# Altium PCB PCB3.PcbDoc
Units mil, origin at the board's own origin, x right, y up, seen from the top; angles counter-clockwise.
Board outline 6000 x 4000 mil, 2 copper layers (Top Layer, Bottom Layer); 25 components, 67 nets, 164 pads, 0 vias.
Unrouted connection lines stored in the file: 38.
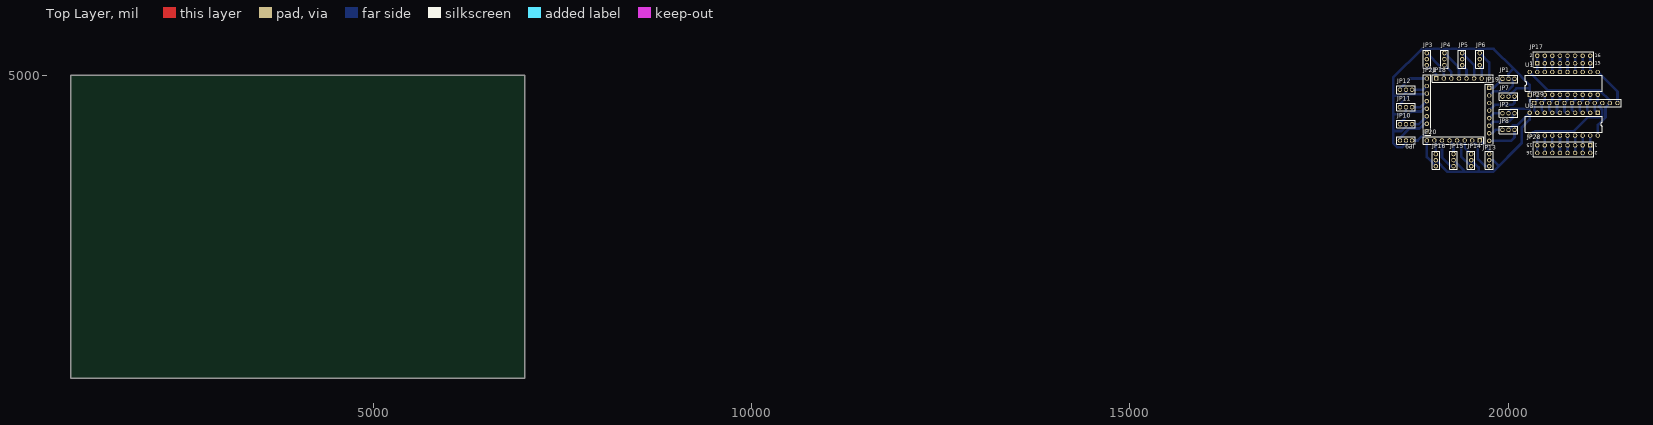
[diagram p0: Top Layer view]
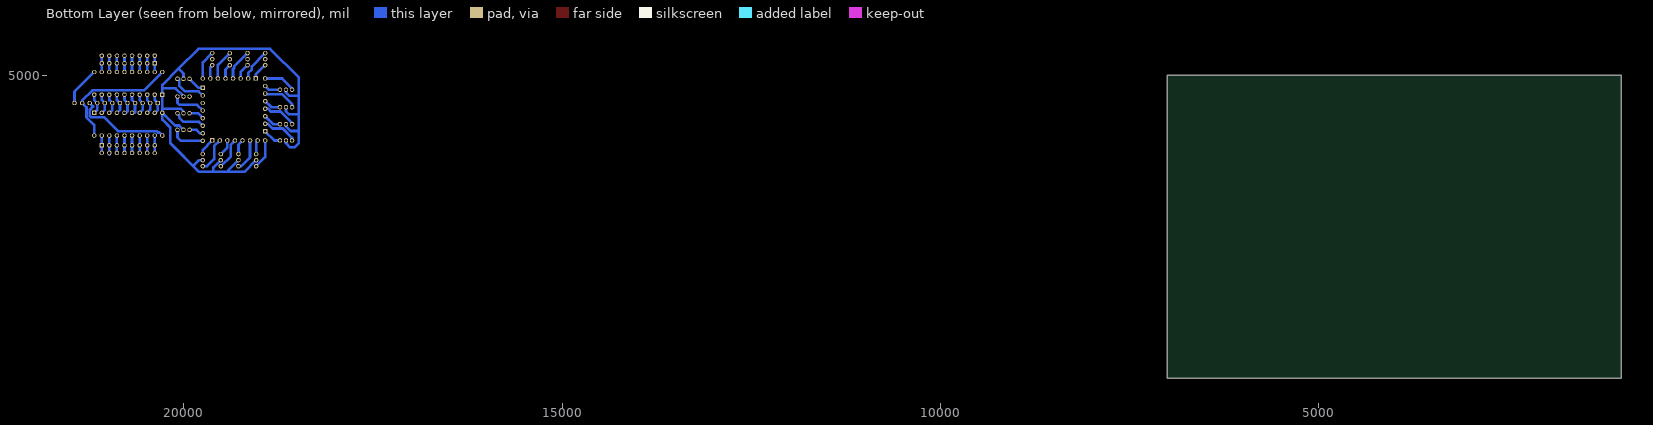
[diagram p1: Bottom Layer view, seen from below]

## Layer stack, top to bottom
Top Solder: solder mask 0.4, Solder Resist, Dk 3.5
Top Layer: signal copper 1.4
Dielectric 1: dielectric 12.6, FR-4, Dk 4.8
Bottom Layer: signal copper 1.4
Bottom Solder: solder mask 0.4, Solder Resist, Dk 3.5

## Board outline
1000,1000 7000,1000 7000,5000 1000,5000

## Design rules (kind name [scope] priority, off if disabled: settings)
Clearance [All] p1: gap=10
PolygonConnect [All] p1: connectstyle=Relief reliefconductorwidth=10 reliefentries=4 polygonreliefangle="90 Angle" airgapwidth=10
RoutingVias [All] p1: holewidth=28 width=50 viastyle="Through Hole" minholewidth=28 minwidth=50 maxholewidth=28 maxwidth=50
SolderMaskExpansion [All] p1: expansion=4
Width [All] p1: maxlimit=50 minlimit=35 preferedwidth=40
30 further rules are at their usual default settings.

## Components (designator, comment, footprint, x,y, rotation, side; value= is the part's Value field where it differs from the comment)
JP1 "HEADER 3" "Header3 80mil" 19925,4955 r0 top
JP2 "HEADER 3" "Header3 80mil" 19925,4500 r0 top
JP3 "HEADER 3" "Header3 80mil" 18925,5135 r90 top
JP4 "HEADER 3" "Header3 80mil" 19158.33,5135 r90 top
JP5 "HEADER 3" "Header3 80mil" 19391.67,5135 r90 top
JP6 "HEADER 3" "Header3 80mil" 19625,5135 r90 top
JP7 "HEADER 3" "Header3 80mil" 19925,4720 r0 top
JP8 "HEADER 3" "Header3 80mil" 19925,4280 r0 top
JP9 "HEADER 3" "Header3 80mil" 18730,4140 r180 top
JP10 "HEADER 3" "Header3 80mil" 18730,4355 r180 top
JP11 "HEADER 3" "Header3 80mil" 18730,4580 r180 top
JP12 "HEADER 3" "Header3 80mil" 18730,4810 r180 top
JP13 "HEADER 3" "Header3 80mil" 19750,3800 r90 top
JP14 "HEADER 3" "Header3 80mil" 19511.67,3800 r90 top
JP15 "HEADER 3" "Header3 80mil" 19278.33,3800 r90 top
JP16 "HEADER 3" "Header3 80mil" 19045,3800 r90 top
JP17 "HEADER 8X2" HDR2X8 20385,5160 r0 top
JP18 "HEADER 8" HDR1X8 19050,4960 r0 top
JP19 "HEADER 8" HDR1X8 19750,4835 r270 top
JP20 "HEADER 8" HDR1X8 19625,4140 r180 top
JP21 "HEADER 8" HDR1X8 18925,4260 r90 top
JP28 "HEADER 8X2" HDR2X8 21085,4075 r180 top
JP29 "HEADER 12" HDR1X12 20345,4635 r0 top
U1 "74HC573" DIP-20 20735,4895 r0 top
U3 "74HC573" DIP-20 20735,4355 r180 top

## Footprints (in the part's own frame and the unit in brackets; to place one, negate y for a bottom-side part, rotate by r counter-clockwise, add the part's x,y. Pads: shape width x height; smd on the part's side, far side on the other; paste and mask are expansions set on the pad)
DIP-20 [mm]
  rect 1.5x1.5 hole 0.9: 1(-11.43,-3.81)
  round 1.5 hole 0.9: 2(-8.89,-3.81) 3(-6.35,-3.81) 4(-3.81,-3.81) 5(-1.27,-3.81) 6(1.27,-3.81) 7(3.81,-3.81) 8(6.35,-3.81) 9(8.89,-3.81) 10(11.43,-3.81) 11(11.43,3.81) 12(8.89,3.81) 13(6.35,3.81) 14(3.81,3.81) 15(1.27,3.81) 16(-1.27,3.81) 17(-3.81,3.81) 18(-6.35,3.81) 19(-8.89,3.81) 20(-11.43,3.81)
  silkscreen extent -13,-2.65 13,2.65
HDR1X8 [mm] "Connector; Header; 8 Position"
  rect 1.5x1.5 hole 0.9: 1(0,0)
  round 1.5 hole 0.9: 2(2.54,0) 3(5.08,0) 4(7.62,0) 5(10.16,0) 6(12.7,0) 7(15.24,0) 8(17.78,0)
  silkscreen extent -1.27,-1.27 19.05,1.27
HDR1X12 [mm] "Connector; Header; 12 Position"
  rect 1.5x1.5 hole 0.9: 1(0,0)
  round 1.5 hole 0.9: 2(2.54,0) 3(5.08,0) 4(7.62,0) 5(10.16,0) 6(12.7,0) 7(15.24,0) 8(17.78,0) 9(20.32,0) 10(22.86,0) 11(25.4,0) 12(27.94,0)
  silkscreen extent -1.27,-1.27 29.21,1.27
HDR2X8 [mm] "Connector; Header; 8x2 Position"
  rect 1.5x1.5 hole 0.9: 1(0,0)
  round 1.5 hole 0.9: 2(0,2.54) 3(2.54,0) 4(2.54,2.54) 5(5.08,0) 6(5.08,2.54) 7(7.62,0) 8(7.62,2.54) 9(10.16,0) 10(10.16,2.54) 11(12.7,0) 12(12.7,2.54) 13(15.24,0) 14(15.24,2.54) 15(17.78,0) 16(17.78,2.54)
  silkscreen extent -1.27,-1.27 19.05,3.81
"Header3 80mil" [mm]
  round 1.5 hole 0.9: 1(0,0) 2(2.032,0) 3(4.064,0)
  silkscreen extent -1.02,-1.27 5.08,1.27

## Part data
JP18 JP19 JP20 JP21: "8 Pin Header"
JP29: "12 Pin Header"

## Nets (pads, with @x,y where several pads share a name; then routed paths per layer and width w, separated by ;. In a path a pad name is that pad's centre, name@x,y a point inside that pad or via, vN(x,y) a via of type N, cw(c..) or ccw(c..) an arc to the next point about the centre after c; other vN are vias at no path point)
A: 
B: 
BL1: JP3.3 JP13.3 JP17.3 JP17.4 JP18.2 JP20.1 U1.18 | length 875.4
  Bottom Layer w35: JP3.3 18925.65,5295 19101.31,5119.34 19101.31,5077.97 19150,5029.28 JP18.2 ; JP20.1 19750,4015 JP13.3 ; U1.18 JP17.3 JP17.4
BL2: JP4.3 JP14.3 JP17.7 JP17.8 JP18.4 JP20.3 U1.16 | length 845.7
  Bottom Layer w35: JP4.3 19158.98,5295 19334.64,5119.34 19334.64,5096.02 19350,5080.66 JP18.4 ; JP20.3 19425,4046.67 JP14.3 ; U1.16 JP17.7 JP17.8
BL3: JP5.3 JP15.3 JP17.11 JP17.12 JP18.6 JP20.5 U1.14 | length 818.1
  Bottom Layer w35: JP20.5 19278.33,4086.67 JP15.3 ; JP5.3 19392.32,5295 19550,5137.32 JP18.6 ; U1.14 JP17.11 JP17.12
BL4: JP6.3 JP16.3 JP17.15 JP17.16 JP18.8 JP20.7 U1.12 | length 790.4
  Bottom Layer w35: JP20.7 19045,4120 JP16.3 ; JP6.3 19625.65,5295 19750,5170.65 JP18.8 ; U1.12 JP17.15 JP17.16
BL5: JP1.3 JP9.3 JP19.2 JP21.2 JP28.3 JP28.4 U3.18 | length 1200.2
  Bottom Layer w35: JP9.3 18570,4175 18692.97,4297.97 18826.61,4297.97 18888.64,4360 JP21.2 ; JP19.2 19805,4790 19986.51,4790 20062.03,4865.52 20062.03,4955 JP1.3 ; JP28.4@20985,3950 JP28.4 JP28.3 U3.18
BL6: JP7.3 JP10.3 JP19.4 JP21.4 JP28.7 JP28.8 U3.16 | length 1140.1
  Bottom Layer w35: JP10.3 18570,4370 18722.97,4522.97 18851.61,4522.97 18888.64,4560 JP21.4 ; JP19.4 19825,4610 20060,4610 20085,4635 JP7.3 ; JP28.8 JP28.7 U3.16
BL7: JP2.3 JP11.3 JP19.6 JP21.6 JP28.11 JP28.12 U3.14 | length 1106.3
  Bottom Layer w35: JP11.3 18570,4620 18702.97,4752.97 18917.97,4752.97 JP21.6 ; JP19.6 19800.94,4385.94 20005,4385.94 20062.03,4442.97 20062.03,4477.03 JP2.3 ; JP28.12 JP28.11 U3.14
BL8: JP8.3 JP12.3 JP19.8 JP21.8 JP28.15 JP28.16 U3.12 | length 1112.5
  Bottom Layer w35: JP12.3 18570,4830 18700,4960 JP21.8 ; JP19.8 20040,4135 20085,4180 JP8.3 ; JP28.16 JP28.15 U3.12
C: 
D: 
D0: 
D1: 
D2: 
D3: 
D4: 
D5: 
D6: 
D7: 
DU: 
E: 
EA: JP29.11 U1.20 U3.20 | length 1744.1
  Bottom Layer w35: U1.20 20527.97,4802.03 21208.62,4802.03 21345,4665.65 JP29.11 21287.03,4577.03 21287.03,4445.44 21185,4343.41 U3.20
F: 
G: 
GND: JP1.2 JP2.2 JP3.2 JP4.2 JP5.2 JP6.2 JP7.2 JP8.2 JP9.2 JP10.2 JP11.2 JP12.2 JP13.2 JP14.2 JP15.2 JP16.2 JP29.9 U1.1 U1.10 U3.1 U3.10 | length 8086.5
  Bottom Layer w35: 18495,4485 18610,4485 18650,4525 JP11.2 ; 18495,4730 18605,4730 18650,4775 JP12.2 ; JP9.2 18650,4105 18595,4050 18535,4050 18480,4105 18480,4265 ; JP10.2 18650,4325 18590,4265 18480,4265 ; JP16.2 19045.65,3880 19200.65,3725 19410,3725 ; JP15.2 19278.98,3880 19410,3748.98 19410,3725 ; JP14.2 19512.32,3880 19610,3782.32 19610,3725 ; JP13.2 19800,3880 19865,3815 ; JP8.2 20005,4280.65 20061.38,4337.03 20117.03,4337.03 U3.10 ; JP2.2 20005,4520 20045,4560 20280,4560 20285,4555 ; JP7.2 20005,4725 20110,4830 20260,4830 ; JP1.2 20005,5025 20070,5090 ; U3.1 21145,4545 JP29.9 21185,4675 U1.10 ; 18480,4265 18480,4972.03 18860,5352.03 19807.97,5352.03 20070,5090 ; 19410,3725 19610,3725 ; 19610,3725 19800,3725 20180,4105 20180,4310 20285,4415 U3.10 ; 20070,5090 20285,4875 U1.1 20285,4555 ; U3.10 20285,4555
H: 
Net1_21: 
NetC1_1: 
NetRP1_1: 
NetRP1_2: 
NetRP1_3: 
NetRP1_4: 
NetRP1_5: 
NetRP1_6: 
NetRP1_7: 
NetRP1_8: 
P10: JP29.1 U1.2 U3.9 | length 273.1
  Bottom Layer w35: U3.9 20345,4545 JP29.1 20385,4675 U1.2
P11: JP29.2 U1.3 U3.8 | length 273.1
  Bottom Layer w35: U3.8 20445,4545 JP29.2 20485,4675 U1.3
P12: JP29.3 U1.4 U3.7 | length 273.1
  Bottom Layer w35: U3.7 20545,4545 JP29.3 20585,4675 U1.4
P13: JP29.4 U1.5 U3.6 | length 260.7
  Bottom Layer w35: 20655,4505 20645,4515 JP29.4 20685,4675 U1.5
P14: JP29.5 U1.6 U3.5 | length 284.9
  Bottom Layer w35: U3.5 20765,4505 20745,4525 JP29.5 20785,4675 U1.6
P15: JP29.6 U1.7 U3.4 | length 273.1
  Bottom Layer w35: U3.4 20845,4545 JP29.6 20885,4675 U1.7
P16: JP29.7 U1.8 U3.3 | length 273.1
  Bottom Layer w35: U3.3 20945,4545 JP29.7 20985,4675 U1.8
P17: JP29.8 U1.9 U3.2 | length 273.1
  Bottom Layer w35: U3.2 21045,4545 JP29.8 21085,4675 U1.9
RE1: JP3.1 JP13.1 JP17.1 JP17.2 JP18.1 JP20.2 U1.19 | length 907.2
  Bottom Layer w35: JP3.1 19050,5010 JP18.1 ; JP20.2 19600,4065 19600,3895 19695,3800 JP13.1 ; U1.19 JP17.1 JP17.2
RE2: JP4.1 JP14.1 JP17.5 JP17.6 JP18.3 JP20.4 U1.17 | length 845.7
  Bottom Layer w35: JP4.1 19250,5043.33 JP18.3 ; JP20.4 19380,4085 19380,3931.02 19511.02,3800 JP14.1 ; U1.17 JP17.5 JP17.6
RE3: JP5.1 JP15.1 JP17.9 JP17.10 JP18.5 JP20.6 U1.15 | length 840.1
  Bottom Layer w35: JP20.6 19125,3915 19240,3800 JP15.1 ; JP5.1 19450,5076.67 JP18.5 ; U1.15 JP17.9 JP17.10
RE4: JP6.1 JP16.1 JP17.13 JP17.14 JP18.7 JP20.8 U1.13 | length 790.4
  Bottom Layer w35: JP20.8 18925,3919.35 19044.35,3800 JP16.1 ; JP6.1 19650,5110 JP18.7 ; U1.13 JP17.13 JP17.14
RE5: JP1.1 JP9.1 JP19.1 JP21.1 JP28.1 JP28.2 U3.19 | length 699.4
  Bottom Layer w35: JP9.1 18805,4140 JP21.1 ; JP19.1 19805,4835 JP1.1 ; JP28.2 JP28.1 U3.19
RE6: JP7.1 JP10.1 JP19.3 JP21.3 JP28.5 JP28.6 U3.17 | length 468.5
  Bottom Layer w35: JP10.1 18820,4355 JP21.3 ; JP28.6 JP28.5 U3.17
RE7: JP2.1 JP11.1 JP19.5 JP21.5 JP28.9 JP28.10 U3.15 | length 660.1
  Bottom Layer w35: JP11.1 18845,4580 JP21.5 ; JP19.5 19815,4500 JP2.1 ; JP28.10 JP28.9 U3.15
RE8: JP8.1 JP12.1 JP19.7 JP21.7 JP28.13 JP28.14 U3.13 | length 639.4
  Bottom Layer w35: JP12.1 18875,4810 JP21.7 ; JP19.7 19785,4235 19830,4280 JP8.1 ; JP28.14 JP28.13 U3.13
RST: 
WE: 
WE1: 
WE2: 
WE3: 
WE4: 
WE5: 
WE6: 
WE7: 
WE8: 
WEBF: JP29.10 U3.11 | length 1272.2
  Bottom Layer w35: U3.11 20325,4245 20344.35,4245 20361.38,4262.03 20872.03,4262.03 21057.97,4447.97 21225.92,4447.97 21242.03,4464.08 21242.03,4545.92 21198.97,4588.97 JP29.10
WELR: JP29.12 U1.11 | length 517.7
  Bottom Layer w35: U1.11 21445,4785 JP29.12
XTAL1: 
XTAL2: 

## Text inside footprints (layer, text, board x,y; h text height)
JP17: Top Overlay "2" at 20285,5240 h50; Top Overlay "1" at 20285,5140 h50; Top Overlay "15" at 21145,5140 h50; Top Overlay "16" at 21145,5240 h50
JP28: Top Overlay "2" at 21185,3995 h50 r180; Top Overlay "1" at 21185,4095 h50 r180; Top Overlay "15" at 20325,4095 h50 r180; Top Overlay "16" at 20325,3995 h50 r180